# Altium PCB BUCK_Converter.PcbDoc
Units mm, origin at the board's own origin, x right, y up, seen from the top; angles counter-clockwise.
Board outline 40.26 x 42.55 mm, 2 copper layers (Top Layer, Bottom Layer); 20 components, 14 nets, 68 pads, 66 vias.
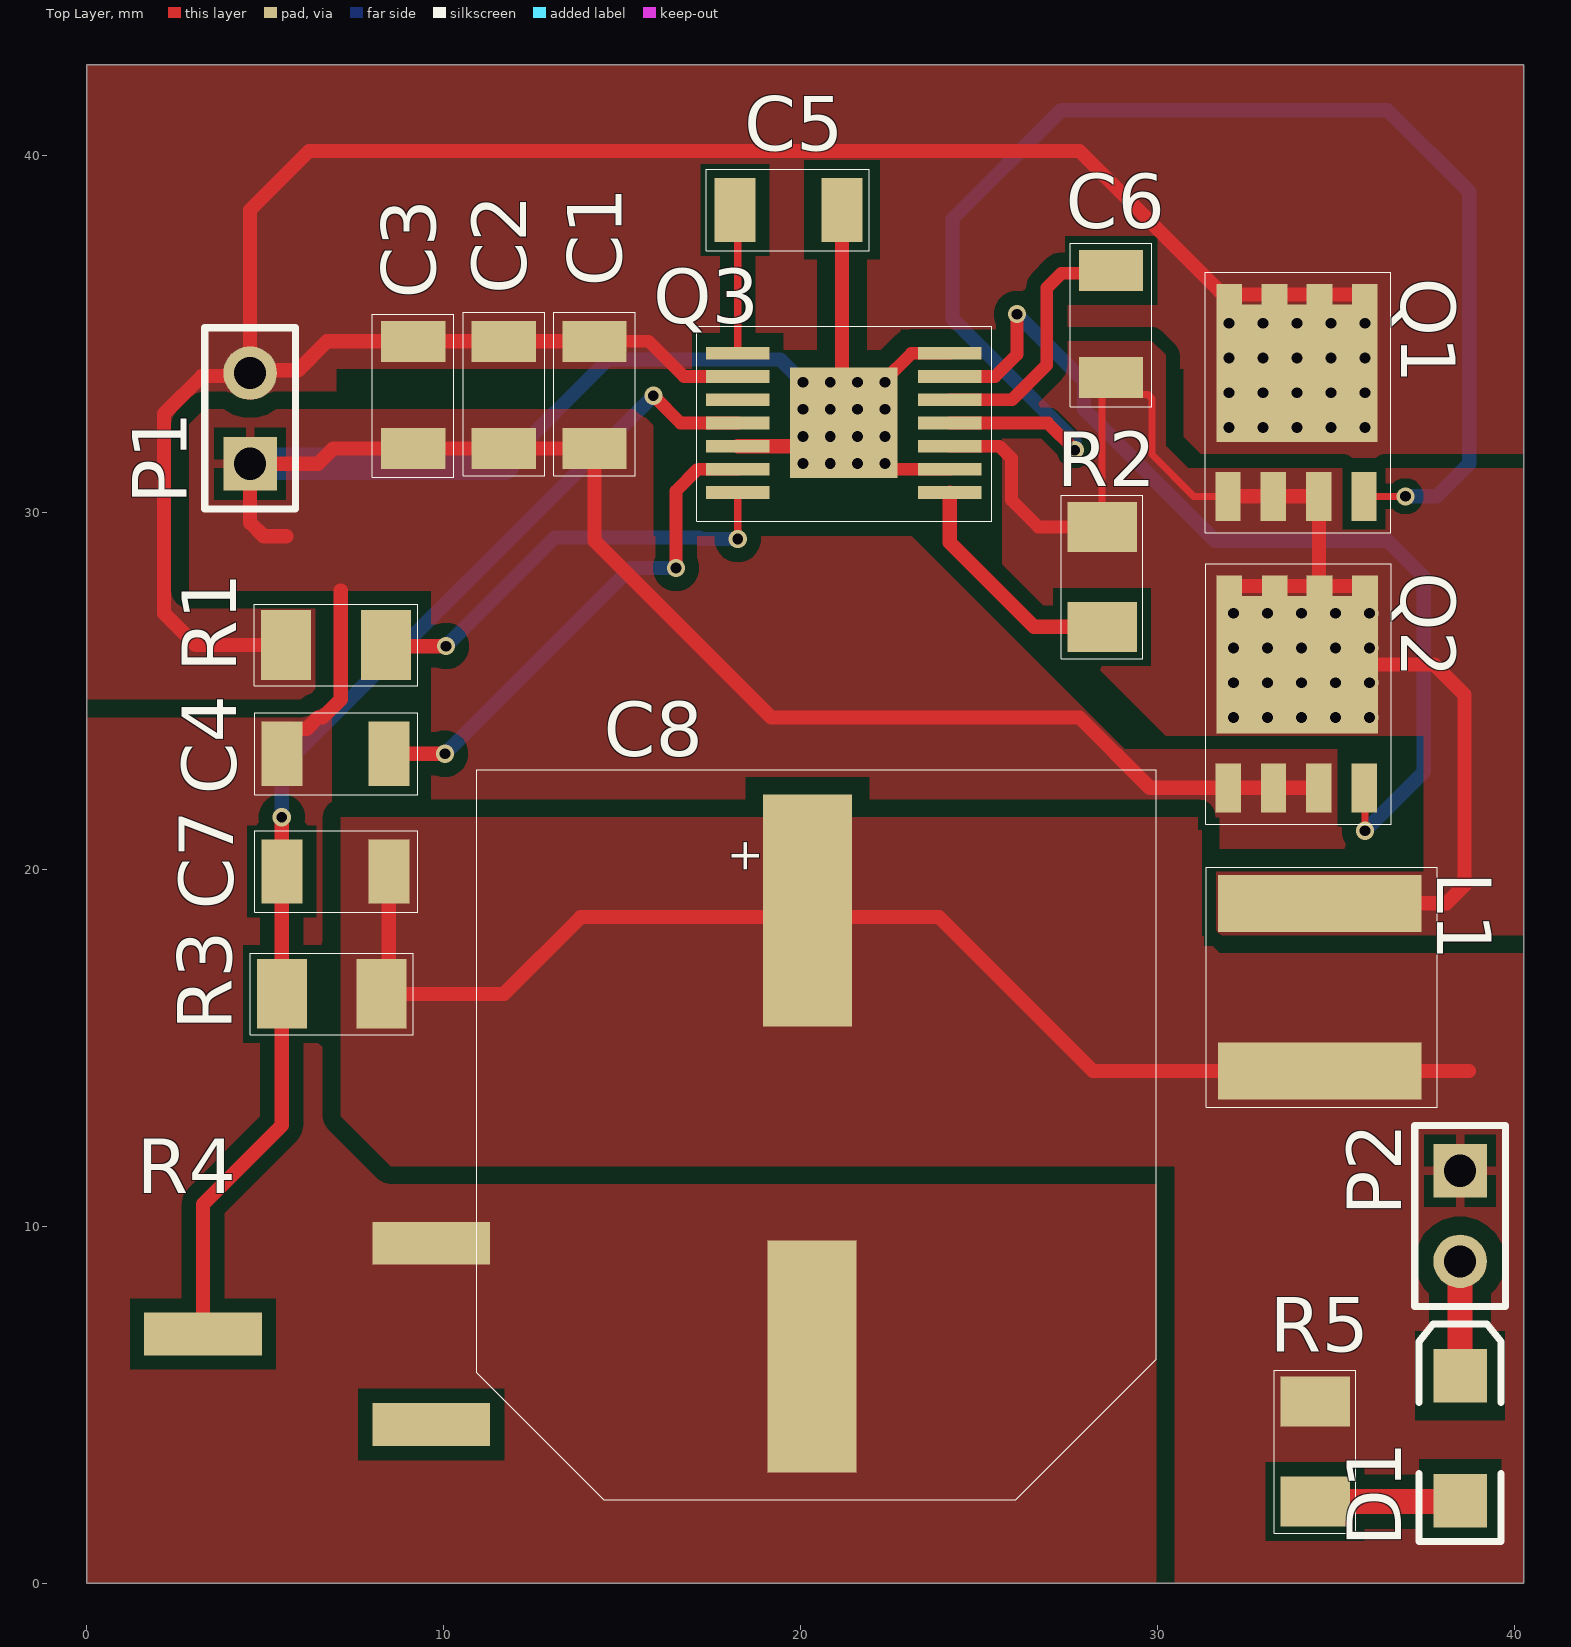
[diagram p0: Top Layer view]
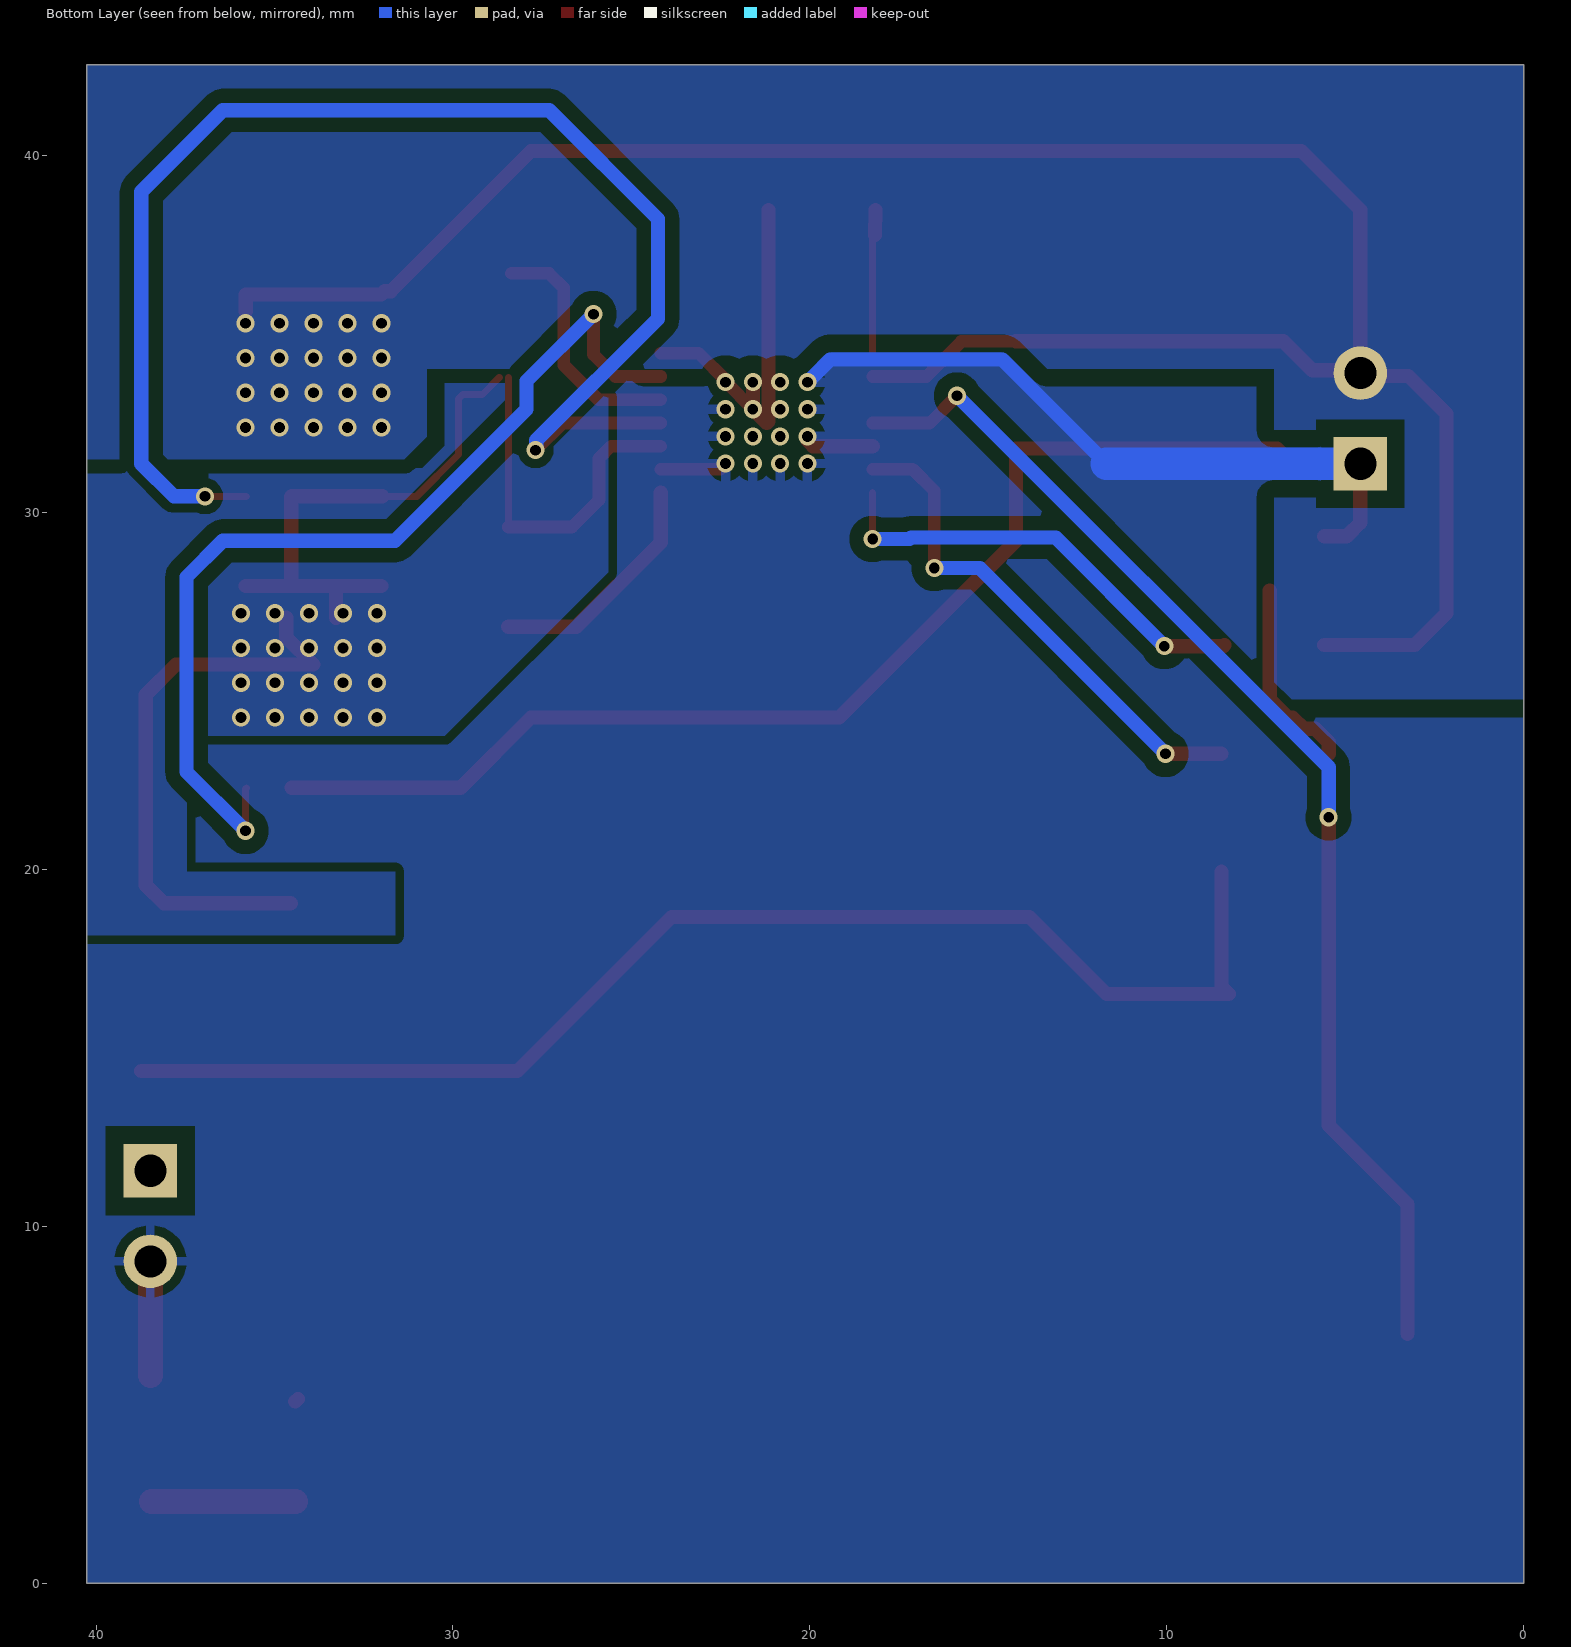
[diagram p1: Bottom Layer view, seen from below]
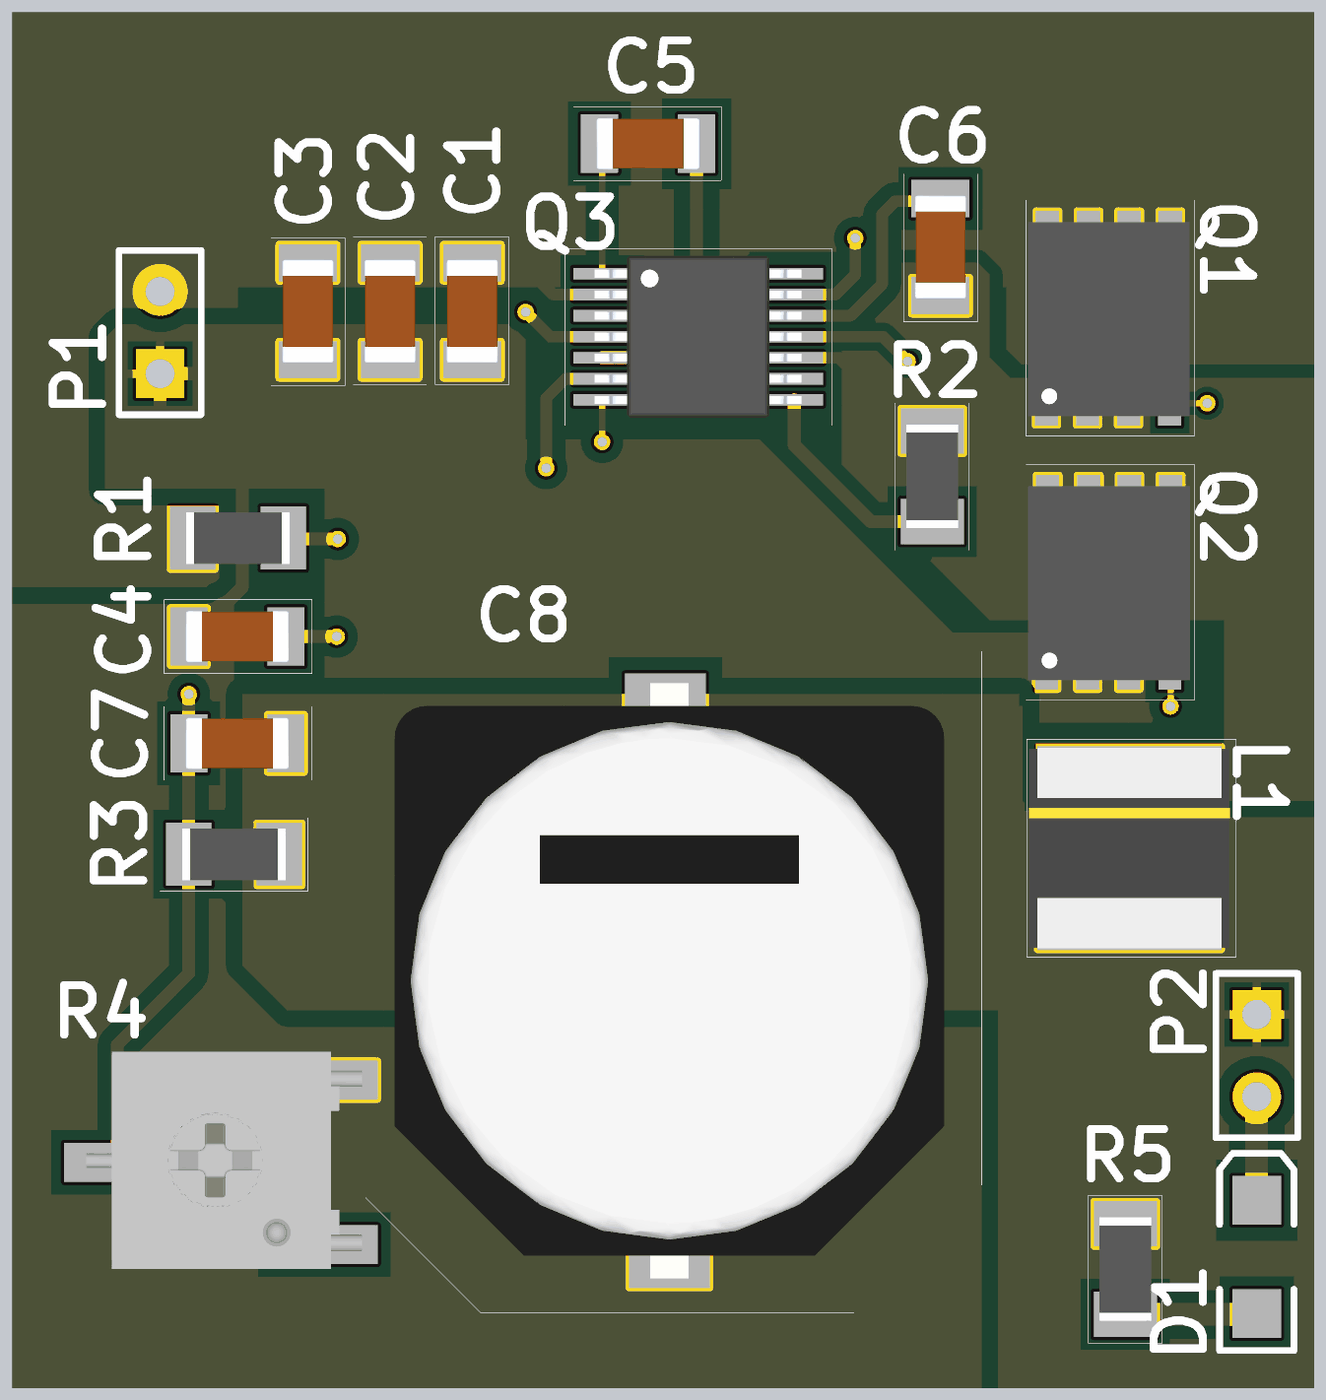
[diagram p2: 3D render of the assembled board from above, using the file's embedded part models]

## Layer stack, top to bottom
Top Solder: solder mask 0.0102, Solder Resist, Dk 3.5
Top Layer: signal copper 0.0356
Dielectric 1: dielectric 0.32, FR-4, Dk 4.8
Bottom Layer: signal copper 0.0356
Bottom Solder: solder mask 0.0102, Solder Resist, Dk 3.5

## Board outline
0,0 40.259,0 40.259,42.545 0,42.545

## Design rules (kind name [scope] priority, off if disabled: settings)
Clearance INPUT_GND_NOISE [InNet('VIN') vs InNet('PGND')] p1: gap=0.5 ignorepadtopadclearanceinfootprint=FALSE
Clearance POW_GND_NOISE [InNet('OUTPUT') vs InNet('PGND')] p2: gap=0.5 ignorepadtopadclearanceinfootprint=FALSE
Clearance ICs_PGND_INPQINP [InNet('PGND') vs InNet('INP_Q2')] p3: gap=0.254 ignorepadtopadclearanceinfootprint=FALSE
Clearance ICs_HG_INPQ2 [InNet('HG') vs InNet('INP_Q2')] p4: gap=0.254 ignorepadtopadclearanceinfootprint=FALSE
Clearance ICs_BST_HG [InNet('BST') vs InNet('HG')] p5: gap=0.254 ignorepadtopadclearanceinfootprint=FALSE
Clearance IC_BST_LG [InNet('BST') vs InNet('LG')] p6: gap=0.254 ignorepadtopadclearanceinfootprint=FALSE
Clearance ICs_PGND_ILIM [InNet('PGND') vs InNet('ILIM')] p7: gap=0.254 ignorepadtopadclearanceinfootprint=FALSE
Clearance [All] p8: gap=0.4 ignorepadtopadclearanceinfootprint=FALSE except(0.254: Arc-Arc Arc-Track Arc-SMDPad Track-Track Track-SMDPad SMDPad-SMDPad)
MinimumSolderMaskSliver [All] p1 off: minsoldermaskwidth=0.254
PolygonConnect MOSFET2 [InNet('VIN') vs InNet('VIN')] p1: connectstyle=Direct reliefconductorwidth=0.254 reliefentries=4 polygonreliefangle="90 Angle" airgapwidth=0.254
PolygonConnect MOSFET1 [InNet('INP_Q2') vs InNet('INP_Q2')] p2: connectstyle=Direct reliefconductorwidth=0.254 reliefentries=4 polygonreliefangle="90 Angle" airgapwidth=0.254
PolygonConnect [All] p3: thpad.connectstyle=Relief thpad.reliefconductorwidth=0.254 thpad.reliefentries=4 thpad.polygonreliefangle="90 Angle" thpad.airgapwidth=0.254 smdpad.connectstyle=Direct smdpad.reliefconductorwidth=0.254 smdpad.reliefentries=4 smdpad.polygonreliefangle="90 Angle" smdpad.airgapwidth=0.254 via.connectstyle=Relief via.reliefconductorwidth=0.254 via.reliefentries=4 via.polygonreliefangle="90 Angle" via.airgapwidth=0.254
RoomDefinition Buck11 [InComponentClass('Buck11')] p1: confinementstyle=ConfineOut formatcopy=TRUE lockcomponents=FALSE outline 45.085,4.064 62.357,4.064 62.357,33.528 45.085,33.528
RoutingVias [All] p1: holewidth=0.254 width=0.508 viastyle="Through Hole" minholewidth=0.254 minwidth=0.508 maxholewidth=0.711 maxwidth=1.27
SilkToSilkClearance [All] p1 off: silktosilkclearance=0.254
SilkToSolderMaskClearance [IsPad] p1 off: minsilkscreentomaskgap=0.254 clearancetoexposedcopper=TRUE
SolderMaskExpansion [All] p1: expansion=0.102 istentingtop=FALSE
UnRoutedNet [All] p1: checkbadconnections=TRUE
UnpouredPolygon [All] p1: allowunpoured=TRUE allowshelved=TRUE
Width [All] p1: maxlimit=1 minlimit=0.1 preferedwidth=0.4
25 further rules are at their usual default settings.

## Components (designator, comment, footprint, x,y, rotation, side; value= is the part's Value field where it differs from the comment)
C1 "10uF" 1206_cap 14.224,31.798 r90 top
C2 "10uF" 1206_cap 11.684,31.798 r90 top
C3 "0.1uF" 1206_cap 9.144,34.798 r270 top
C4 "10uF" 1206_cap 5.461,23.241 r0 top
C5 "2.2uF" 1206_cap 21.161,38.481 r180 top
C6 "470nF" 1206_cap 28.702,36.782 r270 top
C7 "470nF" 1206_cap 5.461,19.939 r0 top
C8 "4700uF" CAp 20.193,18.85 r270 top
D1 "LED2" 3.2X1.6X1.1 38.481,4.064 r90 top
L1 "4.7uH" coill 34.544,19.05 r270 top
P1 "Header 2" HDR1X2 4.572,31.369 r90 top
P2 "Header 2" HDR1X2 38.481,11.557 r270 top
Q1 "CSD18540Q5B" PCBComponent_1 33.249,30.455 r270 top
Q2 "CSD18540Q5B" PCBComponent_1 33.254,22.286 r270 top
Q3 "LM3150MH" LM3150MH 18.239,34.462 r0 top (schematic designator *)
R1 "140K" 1206 5.582,26.289 r0 top
R2 "140K" 1206 28.448,26.797 r90 top
R3 "75K" 1206 5.461,16.51 r0 top
R4 "20k" pot_smd 9.652,4.445 r90 top
R5 "330" 1206 34.417,2.286 r90 top

## Footprints (in the part's own frame and the unit in brackets; to place one, negate y for a bottom-side part, rotate by r counter-clockwise, add the part's x,y. Pads: shape width x height; smd on the part's side, far side on the other; paste and mask are expansions set on the pad)
3.2X1.6X1.1 [mm] "SMT LED; 2 Flat Leads"
  rect 1.5x1.5 smd: 1(-1.75,0) 2(1.75,0)
  silkscreen extent -2.9,-1.15 3.2,1.15
1206 [mm]
  rect 1.4x1.95 smd: 1(0,0) 2(2.8,0)
  silkscreen extent -0.89,-1.14 3.68,1.14, body extent -0.2,-0.8 3,0.8, height 0.6
1206_cap [mm]
  rect 1.15x1.8 smd: 1(0,0) 2(3,0)
  silkscreen extent -0.76,-1.14 3.81,1.14, body extent -0.1,-0.8 3.1,0.8, height 0.88
CAp [mm]
  rect 6.5x2.5 smd: 1(0,0) 2(12.5,0.127)
  silkscreen extent -3.94,-9.27 16.51,9.78, body extent -2.95,-8.37 15.45,8.63, height 16.5
coill [mm]
  rect 1.6x5.7 smd: 1(0,0) 2(4.7,0)
  silkscreen extent -1.02,-3.18 5.72,3.3, body extent -0.75,-3.1 5.45,3.1, height 2.79
HDR1X2 [mm] "Connector; Header; 2 Position"
  rect 1.5x1.5 hole 0.9: 1(0,0)
  round 1.5 hole 0.9: 2(2.54,0)
  silkscreen extent -1.27,-1.27 3.81,1.27
LM3150MH [mm]
  rect 1.78x0.356 smd: 1(0,0) 2(0,-0.65) 3(0,-1.3) 4(0,-1.95) 5(0,-2.6) 6(0,-3.25) 7(0,-3.9) 8(5.94,-3.9) 9(5.94,-3.25) 10(5.94,-2.6) 11(5.94,-1.95) 12(5.94,-1.3) 13(5.94,-0.65) 14(5.94,0)
  rect 3x3.1 smd: 15(2.97,-1.95)
  silkscreen extent -1.14,-4.7 7.11,0.76, body extent -0.23,-4.45 6.17,0.55, height 1.2
PCBComponent_1 [mm]
  rect 1.372x0.71 smd: 1(0,1.27) 1(0,0) 1(0,-1.27) 2(0,2.54)
  rect 0.593x0.72 smd: 3(-5.654,2.56) 3(-5.654,-1.24) 3(-5.654,0.03) 3(-5.654,1.29)
  rect 3.85x4.52 smd: 3(-3.454,0.66)
  silkscreen extent -6.28,-1.91 1.02,3.3, body extent -5.6,-1.84 0.4,3.16, height 1.05
pot_smd [mm]
  rect 1.2x3.3 smd: 1(0,0) 2(2.54,6.4) 3(5.08,0)
  body extent -0.75,-1.17 5.96,7.37, height 5.16

## Part data
C1 C2: library part Capacitor, MF=KEMET
C3: library part Capacitor_smd, manufacturer part number=C1206C104K2REC7800
C4: library part Capacitor_smd, manufacturer part number=C1206X106J4RACAUTO
C5: library part Capacitor_smd, manufacturer part number=C1206X225K4RACAUTO
C6 C7: library part Capacitor_smd, manufacturer part number=C1206C474K1REC7210
C8: library part Capacitor_al, "CAP ALUM 4700UF 20% 10V SMD", MF=Panasonic, PN=EEV-FK1A472M
D1: "Typical RED, GREEN, YELLOW, AMBER GaAs LED", LatestRevisionDate=17-Jul-2002, LatestRevisionNote="Re-released for DXP Platform.", PackageDescription="SM LED; 2 Flat Leads", PackageReference=3.2X1.6X1.1, PackageVersion=Feb-2002, Published=8-Jun-2000, Publisher="Altium Limited"
L1: library part Coil, "FIXED IND 4.7UH 3A 40.3 MOHM SMD", MF="Taiyo Yuden", PN=NR6028T4R7M
P1 P2: "Header, 2-Pin"
R1 R2: library part resistor_smd, manufacturer part number=CRCW1206140KFKEA
R3: library part resistor_smd, manufacturer part number=CRCW120670KFKEA
R4: library part pot, "20 kOhms 0.5W, 1/2W Gull Wing Surface Mount Trimmer Potentiometer Cermet 1.0 Turn Top Adjustment", MF="Bourns Inc.", PN=3361P-1-203GLF
R5: library part resistor_smd, manufacturer part number=CRCW1206330RFKEAC
Q1 Q2: manufacturer part number=CSD18540Q5B

## Via types
v1: diameter 0.508, hole 0.3, Top Layer to Bottom Layer, 66 vias

## Nets (pads, with @x,y where several pads share a name; then routed paths per layer and width w, separated by ;. In a path a pad name is that pad's centre, name@x,y a point inside that pad or via, vN(x,y) a via of type N, cw(c..) or ccw(c..) an arc to the next point about the centre after c; other vN are vias at no path point)
BST: C6.1 Q3.12 | length 6.9
  Top Layer w0.356: Q3.12 25.923,33.162 26.897,34.136 26.897,36.295 27.305,36.703 C6.1@28.369,36.703
EN: Q3.3
FB: C7.1 Q3.4 R3.1 R4.2 | length 34.2
  Top Layer w0.356: v1(15.875,33.274) 16.637,32.512 Q3.4
  Top Layer w0.4: R4.2 3.252,10.618 5.461,12.827 R3.1 C7.1 v1(5.461,21.463)
  Bottom Layer w0.4: v1(5.461,21.463) 5.461,22.86 v1(15.875,33.274)
HG: Q1.2 Q3.11 | length 39.4
  Top Layer w0.2: Q1.2 v1(36.95,30.455)
  Top Layer w0.356: Q3.11 26.924,32.512 v1(27.686,31.75)
  Bottom Layer w0.4: v1(27.686,31.75) 27.665,31.771 27.665,32.025 24.257,35.433 24.257,38.227 27.305,41.275 36.449,41.275 38.735,38.989 38.735,31.369 37.821,30.455 v1(36.95,30.455)
ILIM: Q3.8 R2.1 | length 6.6
  Top Layer w0.4: Q3.8 24.179,29.161 26.543,26.797 R2.1
INP_Q2: C6.2 L1.1 Q1.1 Q2.3 Q3.10 R2.2 | length 41.7
  Top Layer w0.2: R2.2 C6.2@28.448,33.782 ; C6.2 29.175,33.309 29.728,33.309 29.845,33.191 29.845,31.623 31.013,30.455 Q1.1@31.979,30.455
  Top Layer w0.356: Q3.10 25.568,31.862 25.908,31.522 25.908,30.353 26.664,29.597 R2.2
  Top Layer w0.4: Q1.1@31.979,30.455 33.249,30.455 34.519,30.455 34.529,30.444 34.529,27.95 Q2.3@34.539,27.94 ; Q2.3@32.009,27.94 32.014,27.94 Q2.3@33.279,27.94 ; Q2.3@33.279,27.051 Q2.3@33.279,27.94 ; L1.1 38.1,19.05 38.608,19.558 38.608,24.892 37.76,25.74 35.687,25.74 33.914,25.74 33.909,25.74 34.671,26.502 Q2.3@34.671,27.051 ; Q2.3@35.809,27.94 34.544,27.94 Q2.3@34.539,27.94 ; Q2.3@33.279,27.94 33.284,27.94 Q2.3@34.539,27.94
  other v1: 32.131,24.257 33.084,24.257 34.036,24.257 34.989,24.257 35.941,24.257 32.131,25.231 33.084,25.231 34.036,25.231 34.989,25.231 35.941,25.231 32.131,26.204 33.084,26.204 34.036,26.204 34.989,26.204 35.941,26.204 32.131,27.178 33.084,27.178 34.036,27.178 34.989,27.178 35.941,27.178
LG: Q2.2 Q3.13 | length 27.2
  Top Layer w0.2: Q2.2@35.789,22.286 35.814,22.26 v1(35.814,21.082)
  Top Layer w0.356: Q3.13 25.448,33.812 26.065,34.429 v1(26.065,35.56)
  Bottom Layer w0.4: v1(26.065,35.56) 27.94,33.685 27.94,32.893 31.623,29.21 36.449,29.21 37.465,28.194 37.465,22.733 v1(35.814,21.082)
NetD1_1: D1.1 R5.1 | length 4.1
  Top Layer w0.4: D1.1@38.453,2.286 D1.1
  Top Layer w0.7: R5.1 D1.1@38.453,2.286
OUTPUT: C7.2 C8.1 L1.2 P2.1 R3.2 R5.2 | length 36.8
  Top Layer w0.4: C7.2 8.461,16.71 R3.2 8.461,16.51 11.684,16.51 13.843,18.669 19.431,18.669 20.828,18.669 23.876,18.669 28.195,14.35 L1.2 38.734,14.35 ; R5.2@34.344,5.159 R5.2
PGND: C1.1 C2.1 C3.2 C4.1 C5.1 C8.2 D1.2 P1.1 P2.2 Q2.1 Q3.5 Q3.9 Q3.14 Q3.15 R4.3 | length 78.6
  Top Layer w0.2: C1.1 C1.1@14.288,31.862 ; Q3.15@22.352,31.369 Q3.15@22.509,31.212
  Top Layer w0.356: Q3.15@21.59,32.893 Q3.15@22.352,33.655 ; Q3.15@22.327,33.68 23.109,34.462 Q3.14 ; Q3.15@22.509,31.212 Q3.9
  Top Layer w0.4: C4.1 5.461,23.566 5.836,23.941 6.161,23.941 6.477,24.257 6.604,24.257 7.112,24.765 7.112,27.813 ; 5.588,29.337 4.953,29.337 4.572,29.718 P1.1 6.477,31.369 6.906,31.798 C3.2 C2.1 C1.1 14.224,29.21 19.177,24.257 27.813,24.257 29.784,22.286 Q2.1@34.519,22.286 ; Q3.5 19.909,31.862 20.066,32.019 Q3.15@20.066,32.131 ; C5.1 21.161,32.56 Q3.15 21.59,32.893 Q3.15@21.59,33.655
  Top Layer w0.7: D1.2 P2.2
  Bottom Layer w0.4: 11.684,31.369 14.605,34.29 19.431,34.29 v1(20.066,33.655)
  Bottom Layer w0.9: P1.1 11.684,31.369
  other v1: 20.066,31.373 20.832,31.373 21.597,31.373 22.363,31.373 20.066,32.134 20.832,32.134 21.597,32.134 22.363,32.134 20.066,32.894 20.832,32.894 21.597,32.894 22.363,32.894 20.832,33.655 21.597,33.655 22.363,33.655
RON: Q3.7 R1.2 | length 12.5
  Top Layer w0.2: v1(18.239,29.259) Q3.7
  Top Layer w0.4: R1.2 8.414,26.257 v1(10.065,26.257)
  Bottom Layer w0.4: v1(10.065,26.257) 13.111,29.302 17.162,29.302 17.205,29.259 v1(18.239,29.259)
SS: C4.2 Q3.6 | length 14.3
  Top Layer w0.356: v1(16.51,28.448) 16.51,30.607 17.115,31.212 Q3.6
  Top Layer w0.4: C4.2 v1(10.033,23.241)
  Bottom Layer w0.4: v1(10.033,23.241) 15.24,28.448 v1(16.51,28.448)
VCC: C5.2 Q3.1 | length 4.8
  Top Layer w0.2: C5.2 18.239,38.403 Q3.1
  Top Layer w0.4: C5.2 C5.2@18.175,37.781
VIN: C1.2 C2.2 C3.1 P1.2 Q1.3 Q3.2 R1.1 | length 65.3
  Top Layer w0.356: C1.2 15.748,34.798 16.734,33.812 Q3.2
  Top Layer w0.4: R1.1 3.048,26.289 2.159,27.178 2.159,32.766 3.222,33.829 4.492,33.829 P1.2 ; C1.2 C2.2 C3.1 6.731,34.798 5.922,33.989 4.652,33.989 P1.2 ; Q1.3@35.809,35.634 35.809,36.109 34.539,36.109 33.279,36.109 32.009,36.109 31.912,36.206 31.739,36.206 27.813,40.132 6.223,40.132 4.572,38.481 P1.2
  other v1: 32.004,32.385 32.956,32.385 33.909,32.385 34.861,32.385 35.814,32.385 32.004,33.359 32.956,33.359 33.909,33.359 34.861,33.359 35.814,33.359 32.004,34.332 32.956,34.332 33.909,34.332 34.861,34.332 35.814,34.332 32.004,35.306 32.956,35.306 33.909,35.306 34.861,35.306 35.814,35.306
pads on no net: R4.1

## Polygon pours and split planes (outlines as drawn)
PGND on Top Layer "PGND" (solid, pour order 14): 2.794,32.893 15.875,32.893 15.875,29.337 23.114,29.337 29.083,23.368 36.576,23.368 36.83,23.114 36.83,20.955 36.449,20.574 31.75,20.574 31.75,21.463 9.652,21.463 9.652,27.813 2.794,27.813
INP_Q2 on Top Layer "INP_Q2" (solid, pour order 18): 40.259,31.242 30.861,31.242 30.226,31.877 30.226,34.417 29.845,34.798 26.162,34.798 25.654,34.29 25.654,28.321 30.226,23.749 37.465,23.749 37.465,19.939 31.623,19.939 31.623,18.161 40.259,18.161
OUTPUT on Top Layer "OUTPUT" (solid, pour order 13): 40.259,0 30.48,0 30.48,11.684 8.509,11.684 7.112,13.081 7.112,21.463 8.255,21.463 31.242,21.463 31.242,18.161 31.75,17.653 40.259,17.653
VIN on Top Layer "VIN" (solid, pour order 19): 0,42.545 40.259,42.545 40.259,31.496 31.369,31.496 30.734,32.131 30.734,34.036 6.985,34.036 6.985,24.765 0,24.765
PGND on Top Layer "PGND" (solid, pour order 22): 0,24.511 6.858,24.511 6.858,12.827 8.382,11.303 30.988,11.303 30.988,0 0,0
PGND on Bottom Layer "pgnd" (solid, pour order 20): 40.259,42.545 40.259,0 0,0 0,42.545
INP_Q2 on Bottom Layer "INP_Q2 BOT" (solid, pour order 11): 40.259,31.242 30.861,31.242 30.226,31.877 30.226,34.417 29.845,34.798 26.162,34.798 25.654,34.29 25.654,28.321 30.226,23.749 37.465,23.749 37.465,19.939 31.623,19.939 31.623,18.161 40.259,18.161
VIN on Bottom Layer "VIN" (solid, pour order 1): 0,42.545 40.259,42.545 40.259,31.496 31.369,31.496 30.734,32.131 30.734,34.036 6.985,34.036 6.985,24.765 0,24.765

## Text inside footprints (layer, text, board x,y; h text height)
C8: Top Overlay "+" at 17.78,20.882 h1.52 r270